# Altium PCB 7-SEGMENT_DISPLAY_4_DIGITS.PcbDoc
Units mm, origin at the board's own origin, x right, y up, seen from the top; angles counter-clockwise.
Board outline 185.55 x 84.02 mm, 2 copper layers (Top Layer, Bottom Layer); 61 components, 80 nets, 219 pads, 18 vias.
Unrouted connection lines stored in the file: 4.
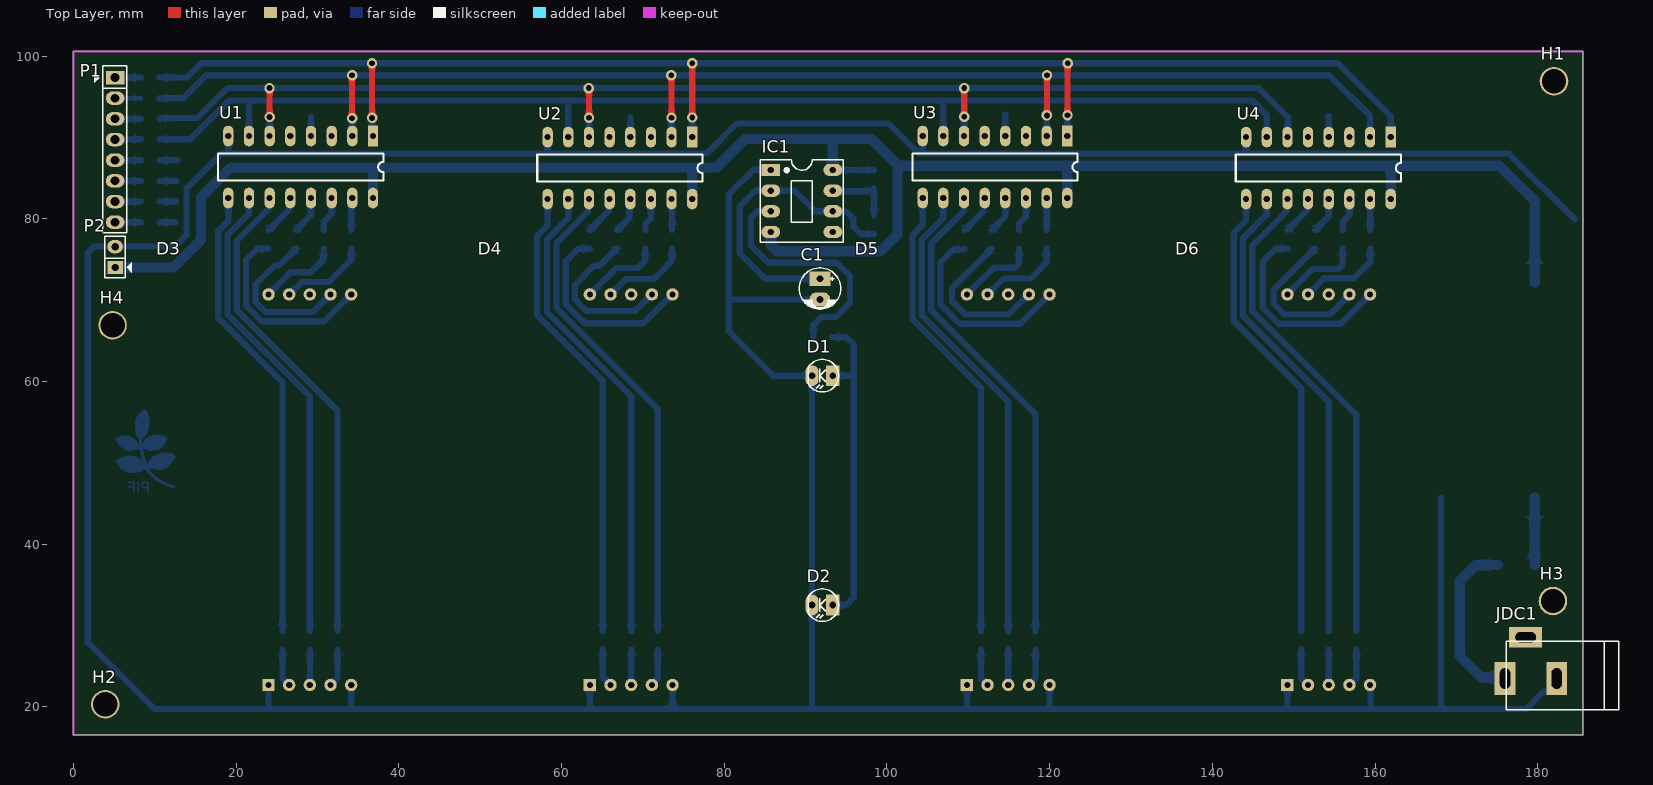
[diagram p0: Top Layer view]
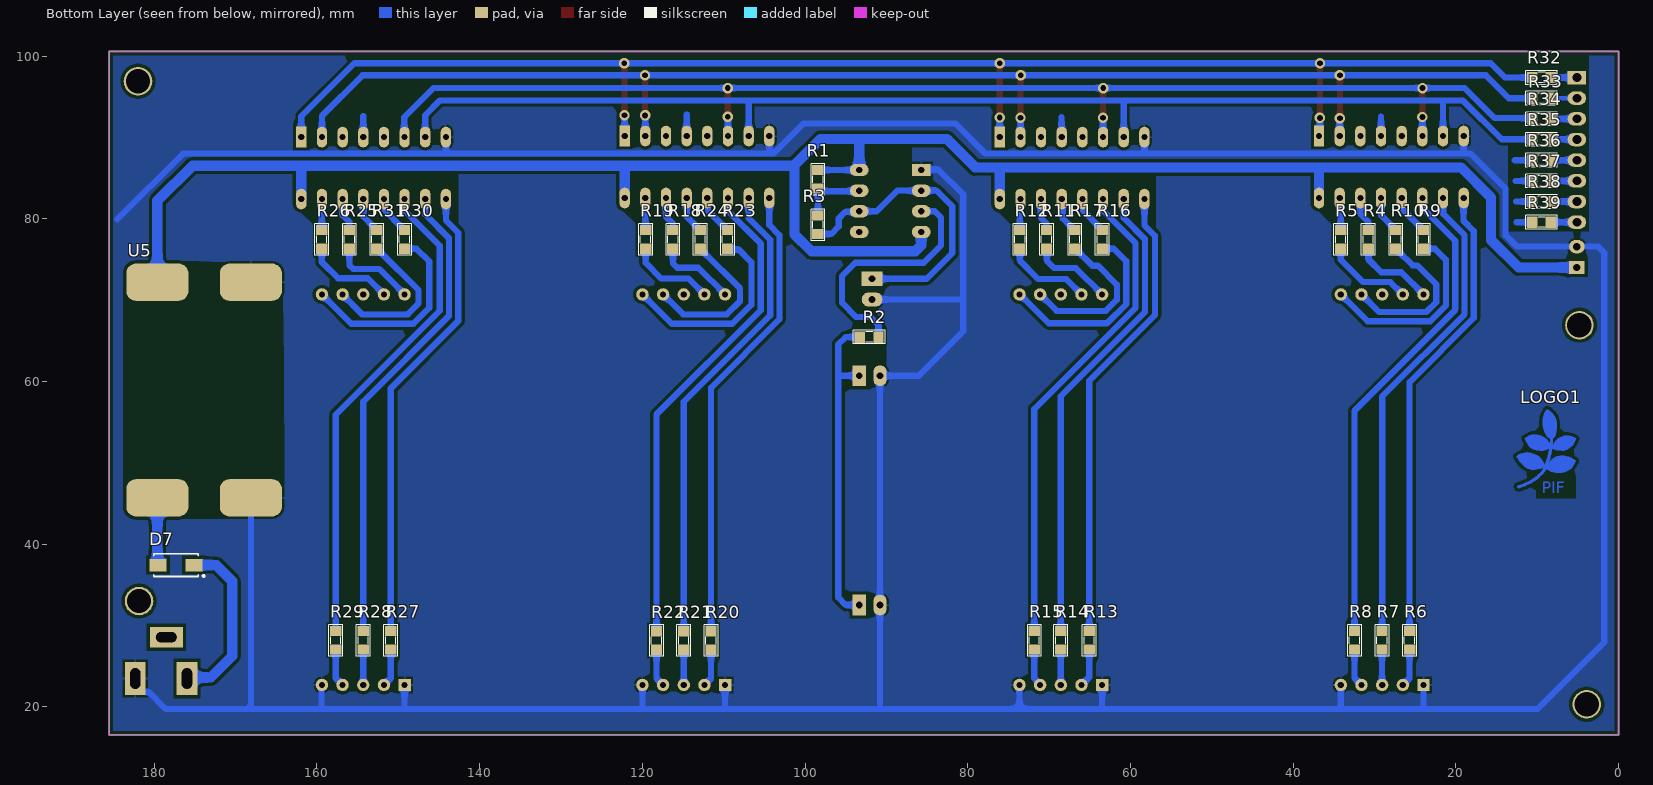
[diagram p1: Bottom Layer view, seen from below]
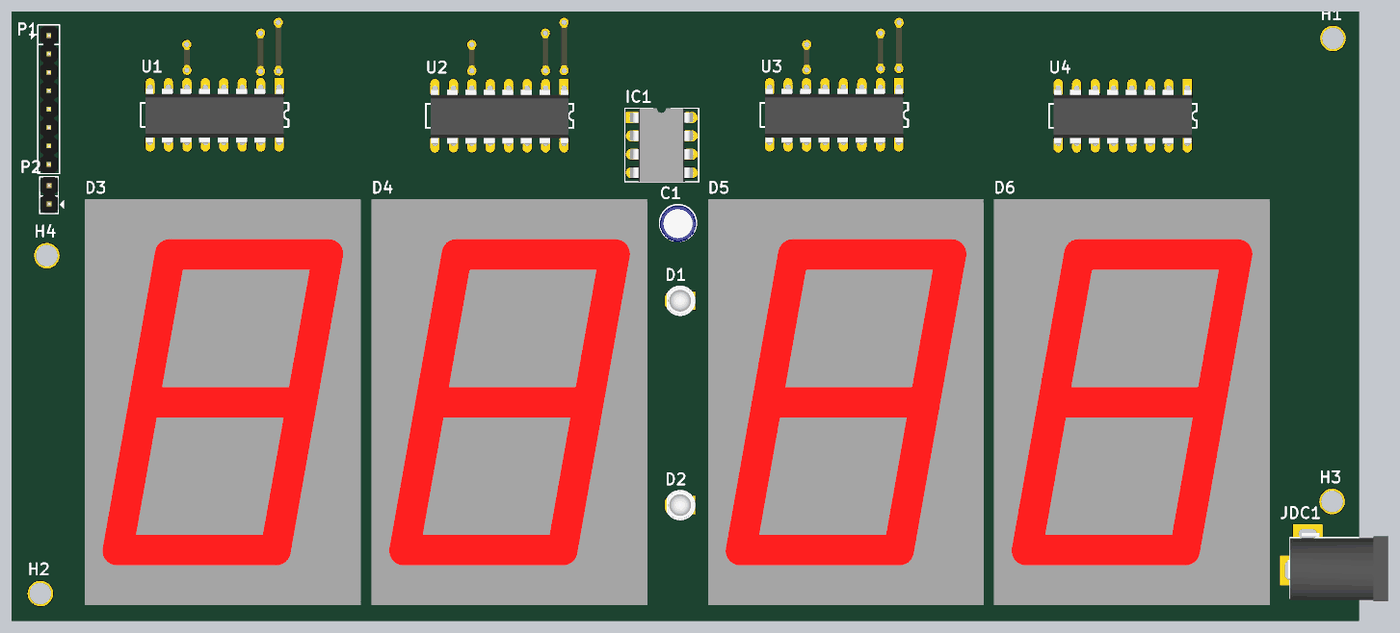
[diagram p2: 3D render of the assembled board from above, using the file's embedded part models]
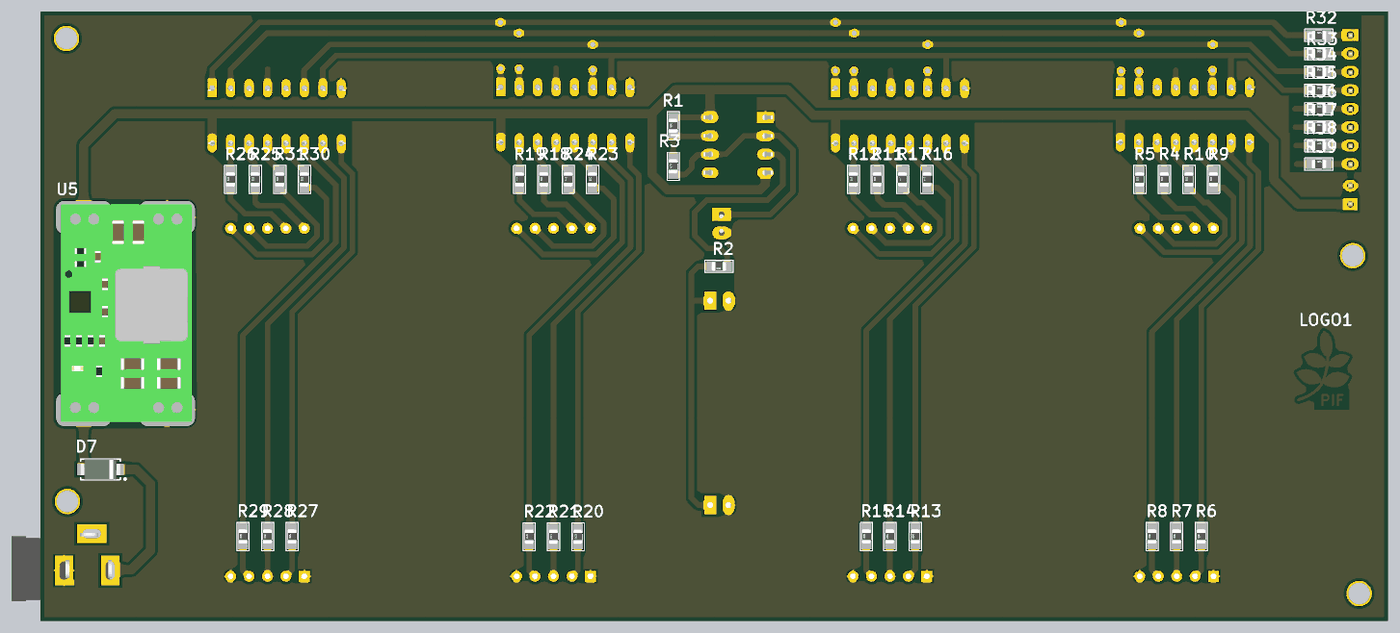
[diagram p3: 3D render of the assembled board from below, using the file's embedded part models]

## Layer stack, top to bottom
Top Solder: solder mask 0.0102, Solder Resist, Dk 3.5
Top Layer: signal copper 0.0356
Dielectric 1: dielectric 0.32, FR-4, Dk 4.8
Bottom Layer: signal copper 0.0356
Bottom Solder: solder mask 0.0102, Solder Resist, Dk 3.5

## Board outline
0,16.561 0,100.584 185.547,100.584 185.547,16.561

## Design rules (kind name [scope] priority, off if disabled: settings)
Clearance [All] p1: gap=0.381 ignorepadtopadclearanceinfootprint=TRUE
PolygonConnect [All] p1: connectstyle=Relief reliefconductorwidth=0.254 reliefentries=4 polygonreliefangle="90 Angle" airgapwidth=0.254
RoutingVias [All] p1: holewidth=0.711 width=1.27 viastyle="Through Hole" minholewidth=0.711 minwidth=1.27 maxholewidth=0.762 maxwidth=1.524
SolderMaskExpansion [All] p1: expansion=0.102 istentingtop=FALSE
Width [All] p1: maxlimit=1.27 minlimit=0.254 preferedwidth=0.762
30 further rules are at their usual default settings.

## Components (designator, comment, footprint, x,y, rotation, side; value= is the part's Value field where it differs from the comment)
C1 "Cap Pol" CP1/2 91.77,72.619 r270 top value=4.7uF
D1 "LED" LED-3mm 93.332,60.719 r180 top
D2 "LED" LED-3mm 93.332,32.525 r180 top
D3 "7-SEGMENT DISPLAY" 7-SEGMENT 29.071,46.701 r0 top
D4 "7-SEGMENT DISPLAY" 7-SEGMENT 68.568,46.701 r0 top
D5 "7-SEGMENT DISPLAY" 7-SEGMENT 114.912,46.701 r0 top
D6 "7-SEGMENT DISPLAY" 7-SEGMENT 154.305,46.701 r0 top
D7 "D Schottky" SS34 177.317,37.44 r0 bottom
H1 "Hole" "LO KHOAN 3MM" 181.991,96.901 r0 top
H2 "Hole" "LO KHOAN 3MM" 3.937,20.32 r0 top
H3 "Hole" "LO KHOAN 3MM" 181.864,33.02 r0 top
H4 "Hole" "LO KHOAN 3MM" 4.826,66.929 r0 top
IC1 "LM555" DIP8/W0.3 85.725,86 r270 top
JDC1 "Jack DC" DC-IN 179.146,26.035 r180 top value="Jac DC"
LOGO1 "LOGO PIF" "PIF LOGO BIG TOP" 12.573,46.711 r180 bottom
P1 "Header 8" JP8 5.131,97.358 r270 top
P2 "Header 2" JP2 5.131,74.015 r90 top
R1 "RESISTOR SMD" RES-SM-0805 98.425,83.714 r90 bottom value=1K
R2 "RESISTOR SMD" RES-SM-0805 90.983,65.456 r0 bottom value=1K
R3 "RESISTOR SMD" RES-SM-0805 98.425,78.126 r90 bottom value=470K
R4 "RESISTOR SMD" RES-SM-0805 30.777,76.327 r90 bottom value=100
R5 "RESISTOR SMD" RES-SM-0805 34.164,76.327 r90 bottom value=100
R6 "RESISTOR SMD" RES-SM-0805 25.698,27.051 r90 bottom value=100
R7 "RESISTOR SMD" RES-SM-0805 29.084,27.051 r90 bottom value=100
R8 "RESISTOR SMD" RES-SM-0805 32.471,27.051 r90 bottom value=100
R9 "RESISTOR SMD" RES-SM-0805 24.004,76.327 r90 bottom value=100
R10 "RESISTOR SMD" RES-SM-0805 27.391,76.327 r90 bottom value=100
R11 "RESISTOR SMD" RES-SM-0805 70.326,76.327 r90 bottom value=100
R12 "RESISTOR SMD" RES-SM-0805 73.602,76.327 r90 bottom value=100
R13 "RESISTOR SMD" RES-SM-0805 65.068,27.051 r90 bottom value=100
R14 "RESISTOR SMD" RES-SM-0805 68.58,27.051 r90 bottom value=100
R15 "RESISTOR SMD" RES-SM-0805 71.824,27.051 r90 bottom value=100
R16 "RESISTOR SMD" RES-SM-0805 63.468,76.327 r90 bottom value=100
R17 "RESISTOR SMD" RES-SM-0805 66.846,76.327 r90 bottom value=100
R18 "RESISTOR SMD" RES-SM-0805 116.243,76.327 r90 bottom value=100
R19 "RESISTOR SMD" RES-SM-0805 119.596,76.327 r90 bottom value=100
R20 "RESISTOR SMD" RES-SM-0805 111.557,27.026 r90 bottom value=100
R21 "RESISTOR SMD" RES-SM-0805 114.91,27.026 r90 bottom value=100
R22 "RESISTOR SMD" RES-SM-0805 118.262,27.026 r90 bottom value=100
R23 "RESISTOR SMD" RES-SM-0805 109.537,76.327 r90 bottom value=100
R24 "RESISTOR SMD" RES-SM-0805 112.89,76.327 r90 bottom value=100
R25 "RESISTOR SMD" RES-SM-0805 156.011,76.327 r90 bottom value=100
R26 "RESISTOR SMD" RES-SM-0805 159.398,76.327 r90 bottom value=100
R27 "RESISTOR SMD" RES-SM-0805 150.918,27.051 r90 bottom value=100
R28 "RESISTOR SMD" RES-SM-0805 154.305,27.051 r90 bottom value=100
R29 "RESISTOR SMD" RES-SM-0805 157.692,27.051 r90 bottom value=100
R30 "RESISTOR SMD" RES-SM-0805 149.238,76.327 r90 bottom value=100
R31 "RESISTOR SMD" RES-SM-0805 152.624,76.327 r90 bottom value=100
R32 "RESISTOR SMD" RES-SM-0805 10.617,97.358 r180 bottom value=10K
R33 "RESISTOR SMD" RES-SM-0805 10.617,94.818 r180 bottom value=10K
R34 "RESISTOR SMD" RES-SM-0805 10.617,92.278 r180 bottom value=10K
R35 "RESISTOR SMD" RES-SM-0805 10.617,89.764 r180 bottom value=10K
R36 "RESISTOR SMD" RES-SM-0805 10.617,87.198 r180 bottom value=10K
R37 "RESISTOR SMD" RES-SM-0805 10.617,84.658 r180 bottom value=10K
R38 "RESISTOR SMD" RES-SM-0805 10.617,82.118 r180 bottom value=10K
R39 "RESISTOR SMD" RES-SM-0805 10.617,79.578 r180 bottom value=10K
U1 "74LS48" 74LS48 36.83,90.17 r270 top
U2 "74LS48" 74LS48 76.073,90.043 r270 top
U3 "74LS48" 74LS48 122.174,90.17 r270 top
U4 "74LS48" 74LS48 161.925,90.043 r270 top
U5 "BUCK MINI560" "BUCK MINI560" 173.863,58.953 r180 bottom

## Footprints (in the part's own frame and the unit in brackets; to place one, negate y for a bottom-side part, rotate by r counter-clockwise, add the part's x,y. Pads: shape width x height; smd on the part's side, far side on the other; paste and mask are expansions set on the pad)
7-SEGMENT [mil]
  rect 60x60 hole 30: 1(-200,-944.88)
  round 60 hole 30: 2(-100,-944.88) 3(0,-944.88) 4(100,-944.88) 5(200,-944.88) 6(200,944.88) 7(100,944.88) 8(0,944.88) 9(-100,944.88) 10(-200,944.88)
  body extent -748,-1102 748,1102, height 476
74LS48 [mil]
  rect 100x50 hole 30: 1(0,0)
  oval 100x50 hole 30: 2(0,-100) 3(0,-200) 4(0,-300) 5(0,-400) 6(0,-500) 7(0,-600) 8(0,-700) 9(300,-700) 10(300,-600) 11(300,-500) 12(300,-400) 13(300,-300) 14(300,-200) 15(300,-100) 16(300,0)
  silkscreen extent 85,-750 215,50, body extent 6,-724 302,24, height 120
"BUCK MINI560" [mm]
  rrect50% 7.62x4.572 smd: 1(-5.75,-13.25) 2(5.75,-13.25) 3(5.75,13.25) 4(-5.75,13.25)
  body extent -8.9,-14.98 9.1,15.02, height 5.62
CP1/2 [mil] "Tu hoa < 22uF/16>50V"
  rect 70x100 hole 32: 1(0,0)
  oval 70x100 hole 32: 2(100,0)
  silkscreen extent -53,-100 146,100, body extent -49,-99 149,99, height 287
DC-IN [mil] "Jac DC input"
  rect 100x160 hole 50 slot 100 at 90 deg: 1(125,100) 2(-125,100)
  rect 160x100 hole 50 slot 100 at 0 deg: 3(25,-100)
  silkscreen extent -425,-80 120,250, body extent -410,-105 134,269, height 434
DIP8/W0.3 [mil] "8 PIN, W 300mil, Pin to pin 100mil"
  rect 60x90 hole 31: 1(0,0)
  oval 60x90 hole 31: 2(100,0) 3(200,0) 4(300,0) 5(300,300) 6(200,300) 7(100,300) 8(0,300)
  silkscreen extent -50,-50 350,350, body extent -50,-40 350,336, height 201
JP2 [mil]
  rect 65x75 hole 36: 1(0,0)
  oval 65x75 hole 36: 2(101,0)
  silkscreen extent -50,-81 150,50, body extent -48,-50 148,48, height 323
JP8 [mil] "JP8"
  rect 65x90 hole 42: 1(0,0)
  oval 65x90 hole 42: 2(100,0) 3(200,0) 4(300,0) 5(400,0) 6(500,0) 7(600,0) 8(700,0)
  silkscreen extent -56,-100 752,57, body extent -48,-50 748,48, height 323
LED-3mm [mil] "LED 2 PIN, 3ly Only colour"
  rect 65x100 hole 32: 1(0,0)
  oval 65x100 hole 32: 2(100,0)
  silkscreen extent -29,-78 118,79, body extent -25,-75 113,75, height 217
"LO KHOAN 3MM" [mil]
  round 138 hole 118.1: 1(0,0)
"PIF LOGO BIG TOP" [mm]
  Top Layer region: 2.616,6.766 2.618,6.765 2.62,6.765 2.852,6.702 2.853,6.702 2.853,6.702 3.022,6.648 3.024,6.647 3.025,6.647 3.205,6.552 3.207,6.55 3.364,6.468 3.364,6.467 3.365,6.467 3.672,6.265 3.674,6.263 3.676,6.262 3.973,5.881 3.973,5.88 3.974,5.879 4.174,5.552 4.174,5.552 4.174,5.551 4.238,5.446 4.239,5.44 4.24,5.435 4.188,5.085 4.187,5.084 4.187,5.082 4.184,5.079 4.183,5.076 4.182,5.076 4.181,5.075 4.18,5.074 4.178,5.073 3.755,4.872 3.753,4.872 3.752,4.871 3.275,4.765 3.273,4.766 3.272,4.765 2.902,4.754 2.901,4.754 2.899,4.754 2.455,4.818 2.454,4.818 2.452,4.818 2.166,4.903 2.166,4.903 2.165,4.903 1.985,4.978 1.984,4.979 1.982,4.98 1.855,5.075 1.855,5.075 1.854,5.075 1.653,5.234 1.652,5.235 1.651,5.236 1.493,5.405 1.492,5.407 1.49,5.408 1.225,5.863 1.225,5.863 1.225,5.864 1.098,6.129 1.098,6.129 1.097,6.13 1.024,6.309 1.024,6.314 1.023,6.319 1.024,6.32 1.024,6.322 1.027,6.325 1.03,6.329 1.305,6.509 1.306,6.509 1.307,6.51 1.613,6.668 1.614,6.669 1.615,6.669 1.806,6.733 1.806,6.733 1.807,6.733 1.955,6.775 1.956,6.775 1.957,6.776 2.148,6.797 2.149,6.797 2.151,6.797
  Top Layer region: 3.754,9.891 3.76,9.891 3.94,9.806 3.94,9.806 3.942,9.805 4.09,9.71 4.091,9.709 4.092,9.708 4.293,9.529 4.293,9.528 4.294,9.528 4.452,9.38 4.452,9.379 4.454,9.378 4.613,9.166 4.613,9.166 4.613,9.166 4.698,9.049 4.698,9.048 4.7,9.046 4.773,8.877 4.773,8.877 4.773,8.877 4.827,8.75 4.827,8.748 4.827,8.747 4.891,8.462 4.891,8.462 4.891,8.462 4.933,8.26 4.933,8.259 4.934,8.259 4.965,8.037 4.965,8.036 4.965,8.035 4.965,7.802 4.965,7.802 4.965,7.801 4.944,7.472 4.944,7.472 4.944,7.472 4.923,7.197 4.922,7.196 4.922,7.196 4.901,7.069 4.901,7.069 4.901,7.068 4.859,6.846 4.858,6.846 4.859,6.845 4.832,6.758 4.832,6.757 4.832,6.756 4.76,6.593 4.759,6.592 4.759,6.591 4.667,6.458 4.667,6.458 4.666,6.457 4.524,6.294 4.523,6.294 4.522,6.292 4.488,6.267 4.489,6.183 4.488,6.18 4.489,6.178 4.486,6.175 4.485,6.171 4.482,6.17 4.481,6.168 4.477,6.168 4.473,6.166 4.471,6.167 4.469,6.167 4.204,6.241 4.202,6.243 4.199,6.243 4.062,6.328 4.062,6.328 4.061,6.329 3.817,6.519 3.816,6.521 3.814,6.522 3.602,6.797 3.602,6.798 3.601,6.799 3.506,6.969 3.506,6.97 3.505,6.971 3.41,7.225 3.336,7.415 3.336,7.416 3.335,7.417 3.282,7.629 3.282,7.629 3.282,7.629 3.229,7.84 3.23,7.842 3.229,7.843 3.218,8.034 3.218,8.034 3.218,8.035 3.218,8.437 3.218,8.438 3.218,8.438 3.239,8.681 3.239,8.682 3.239,8.682 3.271,8.968 3.272,8.97 3.272,8.972 3.346,9.172 3.346,9.173 3.346,9.173 3.421,9.363 3.422,9.364 3.422,9.366 3.57,9.61 3.57,9.61 3.571,9.61 3.686,9.779 3.739,9.884 3.743,9.888 3.748,9.892 3.748,9.892 3.748,9.892
  Top Layer region: 1.304,4.566 1.305,4.566 1.739,4.534 1.74,4.533 1.742,4.533 2.08,4.439 2.081,4.438 2.082,4.438 2.538,4.247 2.539,4.247 2.54,4.247 2.761,4.12 2.763,4.118 2.764,4.117 2.891,4.001 2.892,3.999 2.894,3.998 2.999,3.85 2.999,3.85 3,3.85 3.127,3.659 3.127,3.659 3.127,3.659 3.339,3.331 3.339,3.33 3.339,3.33 3.403,3.203 3.477,3.054 3.478,3.051 3.479,3.047 3.479,3.005 3.478,3.002 3.478,2.999 3.354,2.686 3.353,2.685 3.352,2.683 3.351,2.682 3.35,2.68 3.347,2.679 3.345,2.677 3.343,2.677 3.342,2.676 3.15,2.629 3.012,2.587 3.011,2.587 3.011,2.587 2.81,2.544 2.81,2.544 2.81,2.544 2.535,2.491 2.534,2.491 2.534,2.491 2.29,2.449 2.289,2.449 2.288,2.448 2.055,2.448 2.054,2.449 2.053,2.448 1.821,2.47 1.819,2.47 1.818,2.47 1.639,2.512 1.638,2.513 1.638,2.513 1.384,2.587 1.383,2.588 1.381,2.588 1.094,2.747 1.094,2.747 1.094,2.747 0.945,2.843 0.944,2.845 0.943,2.845 0.646,3.152 0.646,3.152 0.646,3.152 0.467,3.342 0.466,3.343 0.466,3.343 0.349,3.481 0.349,3.483 0.347,3.484 0.263,3.642 0.093,3.938 0.093,3.939 0.093,3.939 0.009,4.098 0.008,4.103 0.007,4.109 0.007,4.109 0.007,4.11 0.011,4.114 0.014,4.119 0.31,4.32 0.312,4.32 0.313,4.321 0.503,4.406 0.504,4.406 0.505,4.406 0.749,4.481 0.749,4.481 0.749,4.481 0.971,4.544 0.973,4.544 0.974,4.545 1.303,4.566
  Top Layer region: 6.291,6.662 6.293,6.662 6.547,6.62 6.547,6.62 6.548,6.62 6.78,6.567 6.782,6.566 6.783,6.566 6.953,6.492 6.953,6.492 6.953,6.492 7.122,6.417 7.123,6.416 7.125,6.416 7.336,6.268 7.339,6.263 7.342,6.259 7.342,6.258 7.343,6.257 7.342,6.252 7.342,6.247 7.3,6.163 7.236,6.005 7.236,6.005 7.236,6.004 7.141,5.814 7.141,5.814 7.141,5.814 7.024,5.581 7.023,5.58 7.022,5.578 6.895,5.419 6.895,5.419 6.895,5.418 6.768,5.27 6.766,5.269 6.765,5.268 6.565,5.119 6.564,5.119 6.564,5.119 6.267,4.928 6.266,4.928 6.264,4.927 6.01,4.832 6.01,4.832 6.009,4.832 5.871,4.789 5.869,4.789 5.868,4.789 5.604,4.767 5.602,4.768 5.601,4.767 5.103,4.82 5.103,4.82 5.102,4.82 4.88,4.852 4.88,4.853 4.879,4.853 4.719,4.895 4.719,4.895 4.718,4.895 4.591,4.938 4.59,4.939 4.588,4.939 4.409,5.045 4.408,5.047 4.406,5.047 4.405,5.049 4.404,5.049 4.403,5.052 4.401,5.055 4.402,5.057 4.401,5.059 4.401,5.06 4.401,5.061 4.453,5.389 4.455,5.391 4.455,5.394 4.635,5.744 4.636,5.744 4.636,5.745 4.763,5.936 4.765,5.937 4.765,5.938 4.943,6.116 4.944,6.116 4.944,6.117 5.169,6.299 5.17,6.299 5.17,6.3 5.195,6.317 5.195,6.317 5.196,6.317 5.247,6.349 5.248,6.349 5.248,6.349 5.301,6.378 5.301,6.378 5.302,6.379 5.356,6.405 5.356,6.405 5.357,6.405 5.384,6.417 5.563,6.502 5.564,6.502 5.564,6.502 5.797,6.598 5.798,6.598 5.8,6.599 6.001,6.641 6.002,6.641 6.003,6.641 6.289,6.663
  Top Layer region: 5.724,4.186 5.725,4.187 5.927,4.166 5.928,4.165 5.929,4.165 6.12,4.113 6.5,4.017 6.501,4.016 6.503,4.016 6.63,3.964 6.63,3.963 6.631,3.963 6.916,3.815 6.917,3.814 6.918,3.814 7.172,3.645 7.172,3.644 7.173,3.644 7.279,3.559 7.281,3.556 7.284,3.553 7.284,3.551 7.285,3.548 7.284,3.545 7.284,3.541 7.21,3.35 7.209,3.35 7.209,3.349 7.093,3.126 7.092,3.126 7.092,3.126 7.008,2.968 7.007,2.967 7.007,2.966 6.785,2.648 6.784,2.648 6.783,2.646 6.635,2.498 6.634,2.497 6.633,2.496 6.463,2.379 6.462,2.379 6.461,2.378 6.292,2.293 6.292,2.293 6.292,2.293 6.048,2.177 6.048,2.177 6.047,2.177 5.899,2.114 5.897,2.114 5.895,2.112 5.641,2.07 5.64,2.07 5.639,2.07 5.258,2.059 5.258,2.059 5.257,2.059 4.855,2.08 4.854,2.081 4.852,2.08 4.546,2.144 4.545,2.144 4.545,2.144 4.291,2.219 4.29,2.22 4.288,2.22 4.034,2.336 4.034,2.336 4.033,2.336 3.842,2.453 3.842,2.454 3.841,2.454 3.703,2.56 3.702,2.561 3.701,2.562 3.7,2.564 3.698,2.566 3.698,2.568 3.697,2.571 3.697,2.572 3.696,2.573 3.697,2.575 3.697,2.578 3.899,3.213 3.902,3.217 3.905,3.222 3.967,3.263 4.198,3.536 4.304,3.663 4.305,3.664 4.306,3.665 4.464,3.802 4.465,3.802 4.466,3.803 4.731,3.973 4.732,3.973 4.733,3.974 4.954,4.08 4.957,4.08 4.958,4.081 5.339,4.155 5.34,4.155 5.341,4.156 5.722,4.187
  Top Layer lines w0.4: 4.343,6.727 4.312,5.861 4.301,5.628 4.28,5.364 4.259,5.099 4.201,4.845 4.106,4.41 4.011,3.987 3.979,3.85 3.662,2.95 3.481,2.516 3.281,2.22 3.1,1.987 2.709,1.616 2.413,1.373 1.588,0.865 1.021,0.607 0.284,0.345
RES-SM-0805 [mil]
  rect 50x55 smd: 1(0,0) 2(90,0)
  silkscreen extent -32,-34 121,33, body extent 6,-25 84,25, height 31
SS34 [mm] "DO-214-AC/SMA Molded Diode, Body 5.3x2.6mm, IPC Medium Density"
  rect 2.1x1.55 smd: A(-2.2,0) K(2.2,0)
  silkscreen extent -3.52,-1.4 2.75,1.45, body extent -2.75,-1.4 2.75,1.4, height 2.3

## Part data
C1: "Polarized Capacitor (Radial)"
D3 D4 D5 D6: library part 7-SEGMENT
D7: "Schottky Diode", Supplier Part Number 1=SS14, Code_JEDEC=DO-214-AA, LatestRevisionDate=17-Jul-2002, LatestRevisionNote="Re-released for DXP Platform.", PackageDescription="DO-214-AA/SMB; 2 C-Bend Leads; Body 5.3 x 3.6 mm, inc. leads (LxW)", PackageReference=SMB, Published=8-Jun-2000, Publisher="Altium Limited", Supplier 1="Arrow Electronics", Supplier 2=RSComponents, Supplier Part Number 2=8080433
H1 H2 H3 H4: "Hole 3mm"
IC1: "Timer"
JDC1: "Jack DC input"
P1: "Header, 8-Pin", LatestRevisionDate=17-Jul-2002, LatestRevisionNote="Re-released for DXP Platform.", Publisher="Altium Limited"
P2: "Header, 2-Pin", LatestRevisionDate=17-Jul-2002, LatestRevisionNote="Re-released for DXP Platform.", Publisher="Altium Limited"
R1 R2 R3 R4 R5 R6 R7 R8 R9 R10 R11 R12 R13 R14 R15 R16 R17 R18 R19 R20 R21 R22 R23 R24 R25 R26 R27 R28 R29 R30 R31 R32 R33 R34 R35 R36 R37 R38 R39: "Resistor"
U1 U2 U3 U4: "74LS48 - ACTIVE HIGH"
U5: "MODULE BUCK MINI560"

## Via types
v1: diameter 1.27, hole 0.711, Top Layer to Bottom Layer, 18 vias

## Nets (pads, with @x,y where several pads share a name; then routed paths per layer and width w, separated by ;. In a path a pad name is that pad's centre, name@x,y a point inside that pad or via, vN(x,y) a via of type N, cw(c..) or ccw(c..) an arc to the next point about the centre after c; other vN are vias at no path point)
+5: IC1.4 IC1.8 P2.1 R1.2 U1.16 U2.16 U3.16 U4.16 U5.4 | length 248.8
  Bottom Layer w0.762: IC1.8 R1.2
  Bottom Layer w1.27: P2.1 12.293,74.015 15.697,77.419 15.697,82.626 19.38,86.309 36.837,86.309 ; U1.16 36.83,86.303 36.837,86.309 ; U2.16 76.073,86.223 75.986,86.309 ; IC1.4 85.725,76.741 86.469,75.997 99.212,75.997 101.308,78.092 101.308,86.601 98.095,89.814 93.363,89.814 ; IC1.8 93.345,89.796 93.363,89.814 ; 101.371,86.538 122.193,86.538 ; U3.16 122.174,86.519 122.193,86.538 ; U4.16 161.925,86.515 161.902,86.538 ; U5.4 179.613,82.204 175.279,86.538 161.902,86.538 ; 36.837,86.309 75.986,86.309 ; 75.986,86.309 79.096,86.309 82.601,89.814 93.363,89.814 ; 122.193,86.538 161.902,86.538
BIT_A: R35.1 U1.7 U2.7 U3.7 U4.7 | length 154.8
  Bottom Layer w0.762: R35.1 14.376,89.764 19.152,94.539 21.627,94.539 ; U1.7 21.59,94.502 21.627,94.539 ; U2.7 60.833,94.534 60.838,94.539 ; U3.7 106.934,94.475 106.998,94.539 ; U4.7 146.685,92.735 144.882,94.539 106.998,94.539 ; 21.627,94.539 60.838,94.539 ; 60.838,94.539 106.998,94.539
BIT_B: R32.1 U1.1 U2.1 U3.1 U4.1 | length 184.3
  Top Layer w0.762: v1(36.712,99.111) 36.728,99.095 v1(36.728,92.405) ; v1(76.068,99.111) 76.073,99.106 v1(76.073,92.456) ; v1(122.199,92.735) 122.199,99.085 v1(122.225,99.111)
  Bottom Layer w0.762: R32.1 13.962,97.358 15.714,99.111 v1(36.712,99.111) v1(76.068,99.111) v1(122.225,99.111) 155.397,99.111 161.925,92.583 U4.1 ; v1(36.728,92.405) 36.728,90.272 U1.1 ; U2.1 v1(76.073,92.456) ; U3.1 122.174,92.71 v1(122.199,92.735)
BIT_C: R33.1 U1.2 U2.2 U3.2 U4.2 | length 177.2
  Top Layer w0.762: v1(34.265,92.354) v1(34.265,97.638) ; v1(73.504,97.638) 73.504,97.618 73.533,97.589 v1(73.533,92.431) ; v1(119.659,92.71) 119.659,97.629 v1(119.668,97.638)
  Bottom Layer w0.762: R33.1 13.5,94.818 16.32,97.638 v1(34.265,97.638) v1(73.504,97.638) v1(119.668,97.638) 154.381,97.638 159.385,92.634 U4.2 ; v1(34.265,92.354) 34.29,92.329 U1.2 ; U2.2 v1(73.533,92.431) ; U3.2 119.634,92.685 v1(119.659,92.71)
BIT_D: R34.1 U1.6 U2.6 U3.6 U4.6 | length 161.9
  Top Layer w0.762: v1(24.105,96.063) 24.13,96.037 v1(24.13,92.507) ; v1(63.365,96.063) 63.373,96.055 v1(63.373,92.431) ; v1(109.499,92.532) v1(109.5,96.063)
  Bottom Layer w0.762: R34.1 10.714,92.375 15.247,92.375 18.935,96.063 v1(24.105,96.063) v1(63.365,96.063) v1(109.5,96.063) 145.679,96.063 149.266,92.476 U4.6@149.266,90.084 ; U1.6 v1(24.13,92.507) ; U2.6 v1(63.373,92.431) ; U3.6 109.474,92.507 v1(109.499,92.532)
DIGIT_1: R36.1 U1.4 | length 4.5
  Bottom Layer w0.762: R36.1 12.776,87.198 ; U1.4 29.21,92.532
DIGIT_2: R37.1 U2.4 | length 4.6
  Bottom Layer w0.762: R37.1 12.7,84.658 ; U2.4 68.478,90.068 68.478,92.507
DIGIT_3: R38.1 U3.4 | length 4.6
  Bottom Layer w0.762: R38.1 12.624,82.118 ; U3.4 114.554,92.812
DIGIT_4: R39.1 U4.4 | length 4.5
  Bottom Layer w0.762: R39.1 12.548,79.578 ; 154.28,92.634 154.305,92.608 U4.4
GND: C1.2 D1.2 D2.2 D3.1 D3.5 D4.1 D4.5 D5.1 D5.5 D6.1 D6.5 IC1.1 JDC1.2 P2.2 U1.8 U2.8 U3.8 U4.8 U5.2 U5.3 | length 577.8
  Bottom Layer w0.762: U1.8 19.05,88.044 19.017,88.011 ; D3.1 23.991,19.736 ; D3.5 34.151,19.76 34.176,19.736 ; U2.8 58.293,88.032 58.272,88.011 ; D4.1 63.488,19.75 63.474,19.736 ; D4.5 73.663,22.687 73.663,19.736 ; IC1.1 85.67,86.055 83.617,86.055 80.569,83.007 80.569,69.875 ; C1.2 80.772,70.079 80.569,69.875 ; U3.8 104.394,88.011 ; D5.1 109.832,19.741 109.826,19.736 ; D5.5 119.992,19.74 119.995,19.736 ; U4.8 144.145,88.079 144.077,88.011 ; D6.1 149.225,19.751 149.24,19.736 ; D6.5@159.42,22.666 159.42,19.736 ; U5.2 168.113,20.182 168.559,19.736 ; JDC1.2 182.321,22.733 181.432,21.844 180.67,21.844 178.562,19.736 168.559,19.736 ; 184.531,79.934 176.454,88.011 144.077,88.011 ; 19.017,88.011 58.272,88.011 ; 19.017,88.011 18.195,88.011 13.894,83.71 13.894,77.978 12.497,76.581 2.54,76.581 1.778,75.819 1.778,27.94 9.982,19.736 23.991,19.736 ; 23.991,19.736 34.176,19.736 ; 34.176,19.736 63.474,19.736 ; 58.272,88.011 77.826,88.011 81.534,91.719 100.178,91.719 103.886,88.011 104.394,88.011 ; 63.474,19.736 73.663,19.736 ; 73.663,19.736 90.86,19.736 ; 80.569,69.875 80.569,66.167 86.017,60.719 D1.2 D2.2 90.792,19.803 90.86,19.736 ; 90.86,19.736 109.826,19.736 ; 104.394,88.011 144.077,88.011 ; 109.826,19.736 119.995,19.736 ; 119.995,19.736 149.24,19.736 ; 149.24,19.736 159.42,19.736 ; 159.42,19.736 168.559,19.736
NetC1_1: C1.1 IC1.2 IC1.6 R3.1 | length 37.3
  Bottom Layer w0.762: C1.1@92.025,72.619 85.065,72.619 81.915,75.768 81.915,81.534 83.871,83.49 85.695,83.49 IC1.2 88.65,83.46 91.19,80.92 IC1.6 93.417,80.848 95.047,80.848 95.86,80.035 95.86,79.07 96.804,78.126 R3.1
NetD1_1: D1.1 D2.1 R2.2 | length 39.7
  Bottom Layer w0.762: R2.2 95.021,65.456 95.912,64.565 95.912,60.693 ; D2.1 94.981,32.525 95.912,33.456 95.912,60.693 ; D1.1 95.886,60.719 95.912,60.693
NetD3_2: D3.2 R6.1 | length 4.7
  Bottom Layer w0.762: R6.1 25.698,23.535 D3.2
NetD3_3: D3.3 R7.1 | length 4.4
  Bottom Layer w0.762: D3.3 29.084,22.714 R7.1
NetD3_4: D3.4 R8.1 | length 4.7
  Bottom Layer w0.762: D3.4 32.471,23.561 R8.1
NetD3_6: D3.6 R9.1 | length 24
  Bottom Layer w0.762: R9.1 24.001,76.33 22.609,76.33 21.234,74.955 21.234,69.326 23.149,67.412 30.862,67.412 D3.6
NetD3_7: D3.7 R10.1 | length 19.6
  Bottom Layer w0.762: R10.1 27.327,76.327 27.073,76.073 27.073,76.01 25.333,74.27 24.765,74.27 22.428,71.933 22.428,69.748 23.622,68.555 29.465,68.555 D3.7
NetD3_9: D3.9 R5.1 | length 10.8
  Bottom Layer w0.762: D3.9 28.055,72.225 31.407,72.225 34.164,74.982 R5.1
NetD3_10: D3.10 R4.1 | length 9.9
  Bottom Layer w0.762: D3.10 26.722,73.431 29.185,73.431 30.749,74.995 30.749,76.298 R4.1
NetD4_2: D4.2 R13.1 | length 4.7
  Bottom Layer w0.762: R13.1 65.068,23.662 D4.2
NetD4_3: D4.3 R14.1 | length 4.4
  Bottom Layer w0.762: D4.3 68.58,22.713 R14.1
NetD4_4: D4.4 R15.1 | length 4.6
  Bottom Layer w0.762: D4.4 71.108,22.813 71.824,23.529 R15.1
NetD4_6: D4.6 R16.1 | length 24.4
  Bottom Layer w0.762: R16.1 62.052,76.327 60.528,74.803 60.528,69.52 62.89,67.158 70.053,67.158 73.597,70.701 D4.6
NetD4_7: D4.7 R17.1 | length 19.7
  Bottom Layer w0.762: R17.1 66.782,76.327 64.674,74.219 63.983,74.219 61.671,71.907 61.671,70.028 63.017,68.682 69.088,68.682 D4.7
NetD4_9: D4.9 R12.1 | length 10.8
  Bottom Layer w0.762: D4.9 66.028,70.727 67.894,72.593 71.323,72.593 73.602,74.872 R12.1
NetD4_10: D4.10 R11.1 | length 10
  Bottom Layer w0.762: D4.10 66.727,73.939 69.393,73.939 70.282,74.828 70.282,76.022 70.326,76.066 R11.1
NetD5_2: D5.2 R20.1 | length 4.7
  Bottom Layer w0.762: R20.1 111.557,23.529 112.372,22.714 D5.2
NetD5_3: D5.3 R21.1 | length 4.3
  Bottom Layer w0.762: R21.1 114.91,22.703 D5.3
NetD5_4: D5.4 R22.1 | length 4.7
  Bottom Layer w0.762: D5.4 117.452,22.718 118.262,23.529 R22.1
NetD5_6: D5.6 R23.1 | length 24.7
  Bottom Layer w0.762: R23.1 109.436,76.225 108.153,76.225 106.604,74.676 106.604,69.444 108.941,67.107 116.397,67.107 D5.6
NetD5_7: D5.7 R24.1 | length 19.7
  Bottom Layer w0.762: R24.1 112.827,76.327 112.573,76.073 112.573,76.01 108.001,71.438 108.001,69.85 109.601,68.25 115,68.25 D5.7
NetD5_9: D5.9 R19.1 | length 10.6
  Bottom Layer w0.762: D5.9 114.315,72.644 117.653,72.644 119.596,74.587 R19.1
NetD5_10: D5.10 R18.1 | length 9.8
  Bottom Layer w0.762: D5.10 113.121,73.99 115.722,73.99 116.243,74.511 R18.1
NetD6_2: D6.2 R27.1 | length 4.7
  Bottom Layer w0.762: R27.1 150.918,23.548 D6.2
NetD6_3: D6.3 R28.1 | length 4.3
  Bottom Layer w0.762: D6.3 R28.1
NetD6_4: D6.4 R29.1 | length 4.7
  Bottom Layer w0.762: D6.4 157.692,23.548 R29.1
NetD6_6: D6.6 R30.1 | length 24.9
  Bottom Layer w0.762: R30.1 147.777,76.327 146.202,74.752 146.202,69.037 148.133,67.107 155.791,67.107 D6.6
NetD6_7: D6.7 R31.1 | length 19.8
  Bottom Layer w0.762: R31.1 152.561,76.327 152.307,76.073 152.307,76.01 147.498,71.2 147.498,69.596 148.844,68.25 154.457,68.25 156.845,70.637 D6.7
NetD6_9: D6.9 R26.1 | length 10.9
  Bottom Layer w0.762: D6.9 153.759,72.695 157.404,72.695 159.398,74.689 R26.1
NetD6_10: D6.10 R25.1 | length 10.3
  Bottom Layer w0.762: D6.10 152.362,73.838 155.55,73.838 156.011,74.299 R25.1
NetD7_K: D7.K U5.1 | length 8.2
  Bottom Layer w1.27: D7.K@179.613,37.487 U5.1
NetIC1_3: IC1.3 R2.1 | length 30.3
  Bottom Layer w0.762: IC1.3 84.07,80.92 83.312,80.162 83.312,76.708 85.42,74.6 93.828,74.6 95.453,72.974 95.453,69.672 93.701,67.92 91.923,67.92 90.983,66.98 R2.1
NetIC1_7: IC1.7 R1.1 R3.2 | length 8.2
  Bottom Layer w0.762: IC1.7 93.417,83.388 98.036,83.388 98.361,83.714 R1.1 ; R3.2 R1.1@98.425,83.388
NetP1_1: P1.1 R32.2 | length 3.2
  Bottom Layer w0.762: P1.1 R32.2
NetP1_2: P1.2 R33.2 | length 3.2
  Bottom Layer w0.508: P1.2 R33.2
NetP1_3: P1.3 R34.2 | length 3.2
  Bottom Layer w0.762: P1.3 R34.2
NetP1_4: P1.4 R35.2 | length 3.2
  Bottom Layer w0.762: P1.4 5.156,89.764 R35.2
NetP1_5: P1.5 R36.2 | length 3.2
  Bottom Layer w0.762: P1.5 R36.2
NetP1_6: P1.6 R37.2 | length 3.2
  Bottom Layer w0.762: P1.6 R37.2
NetP1_7: P1.7 R38.2 | length 3.2
  Bottom Layer w0.762: P1.7 R38.2
NetP1_8: P1.8 R39.2 | length 3.2
  Bottom Layer w0.762: P1.8 R39.2
NetR4_2: R4.2 U1.14 | length 4.3
  Bottom Layer w0.762: R4.2 30.785,78.62 30.785,79.629 31.75,80.594 U1.14
NetR5_2: R5.2 U1.15 | length 4
  Bottom Layer w0.762: R5.2 34.164,81.652 34.29,81.778 U1.15
NetR6_2: R6.2 U1.9 | length 57
  Bottom Layer w0.762: U1.9 19.075,82.525 19.075,79.756 17.805,78.486 17.805,67.811 25.698,59.919 R6.2
NetR7_2: R7.2 U1.10 | length 58.5
  Bottom Layer w0.762: U1.10 21.59,80.62 18.948,77.978 18.948,68.284 29.072,58.161 29.072,29.35 R7.2
NetR8_2: R8.2 U1.11 | length 60
  Bottom Layer w0.762: U1.11 24.033,82.453 24.033,81.234 20.091,77.292 20.091,68.91 20.117,68.885 20.117,68.732 32.471,56.378 R8.2
NetR9_2: R9.2 U1.12 | length 5.1
  Bottom Layer w0.762: R9.2 24.068,78.613 24.322,78.867 24.322,78.93 26.573,81.182 26.573,82.453 U1.12
NetR10_2: R10.2 U1.13 | length 4.7
  Bottom Layer w0.762: R10.2 27.454,78.613 27.708,78.867 27.708,78.93 29.21,80.432 U1.13
NetR11_2: R11.2 U2.14 | length 4.1
  Bottom Layer w0.762: R11.2 70.313,78.626 70.313,79.4 70.993,80.08 U2.14
NetR12_2: R12.2 U2.15 | length 3.8
  Bottom Layer w0.762: U2.15 73.602,82.354 R12.2
NetR13_2: R13.2 U2.9 | length 57
  Bottom Layer w0.762: U2.9 58.293,79.223 56.998,77.927 56.998,68.157 65.068,60.087 R13.2
NetR14_2: R14.2 U2.10 | length 58.4
  Bottom Layer w0.762: U2.10 60.833,80.112 58.238,77.517 58.238,68.533 68.58,58.191 R14.2
NetR15_2: R15.2 U2.11 | length 59.9
  Bottom Layer w0.762: U2.11 63.276,82.326 63.276,81.332 63.246,81.302 63.246,80.874 59.381,77.009 59.381,69.05 71.824,56.608 R15.2
NetR16_2: R16.2 U2.12 | length 4.9
  Bottom Layer w0.762: R16.2 63.531,78.613 63.785,78.867 63.785,78.93 65.816,80.961 65.816,82.326 U2.12
NetR17_2: R17.2 U2.13 | length 4.5
  Bottom Layer w0.762: R17.2 66.909,78.613 68.356,80.059 68.356,82.326 U2.13
NetR18_2: R18.2 U3.14 | length 4.3
  Bottom Layer w0.762: R18.2 116.23,78.626 116.23,79.4 117.094,80.264 U3.14
NetR19_2: R19.2 U3.15 | length 4
  Bottom Layer w0.762: R19.2 119.634,78.651 U3.15
NetR20_2: R20.2 U3.9 | length 57.2
  Bottom Layer w0.762: U3.9 104.394,79.248 103.149,78.003 103.149,67.649 111.557,59.242 R20.2
NetR21_2: R21.2 U3.10 | length 58.7
  Bottom Layer w0.762: U3.10 106.934,80.061 104.292,77.419 104.292,68.123 114.91,57.506 R21.2
NetR22_2: R22.2 U3.11 | length 60.2
  Bottom Layer w0.762: U3.11 109.449,82.525 109.449,80.95 105.461,76.962 105.461,68.758 118.262,55.956 R22.2
NetR23_2: R23.2 U3.12 | length 5
  Bottom Layer w0.762: R23.2 109.601,78.613 109.855,78.867 109.855,78.93 111.932,81.007 111.932,82.468 U3.12
NetR24_2: R24.2 U3.13 | length 4.7
  Bottom Layer w0.762: R24.2 112.954,78.613 113.208,78.867 113.208,78.93 114.554,80.277 U3.13
NetR25_2: R25.2 U4.14 | length 4.2
  Bottom Layer w0.762: R25.2 156.032,78.634 156.032,79.629 156.845,80.442 U4.14
NetR26_2: R26.2 U4.15 | length 3.8
  Bottom Layer w0.762: U4.15 159.398,82.41 R26.2
NetR27_2: R27.2 U4.9 | length 57.2
  Bottom Layer w0.762: U4.9 144.145,79.807 142.621,78.283 142.621,67.437 150.918,59.14 R27.2
NetR28_2: R28.2 U4.10 | length 58.7
  Bottom Layer w0.762: U4.10 146.685,80.543 143.764,77.622 143.764,68.072 154.305,57.531 R28.2
NetR29_2: R29.2 U4.11 | length 60.2
  Bottom Layer w0.762: U4.11 149.128,82.326 149.128,80.914 144.907,76.693 144.907,68.707 157.692,55.922 R29.2
NetR30_2: R30.2 U4.12 | length 4.9
  Bottom Layer w0.762: R30.2 149.301,78.613 149.555,78.867 149.555,78.93 151.668,81.043 151.668,82.326 U4.12
NetR31_2: R31.2 U4.13 | length 4.5
  Bottom Layer w0.762: R31.2 152.688,78.613 152.942,78.867 152.942,78.93 154.305,80.294 U4.13
VCC7-20V: D7.A JDC1.1 | length 21.4
  Bottom Layer w0.762: JDC1.1@175.743,23.622 175.87,23.495 JDC1.1
  Bottom Layer w1.27: D7.A 172.39,37.44 170.409,35.458 170.409,26.264 173.05,23.622 JDC1.1@175.743,23.622
pads on no net: D3.8 D4.8 D5.8 D6.8 H1.1 H2.1 H3.1 H4.1 IC1.5 JDC1.3 U1.3 U1.5 U2.3 U2.5 U3.3 U3.5 U4.3 U4.5

## Polygon pours and split planes (outlines as drawn)
GND on Bottom Layer "GND_L02_P001" (solid, remove dead copper, pour order 1): 0,16.561 0,100.584 185.547,100.584 185.547,16.561

## Keep-outs
Keep-Out Layer:
  lines w0.254: 0,16.561 0,100.584 185.547,100.584 185.547,21.336 185.547,16.561 0,16.561

## Other copper
Bottom Layer:
  pour cut-out: 89.967,64.376 90.022,64.321 90.022,61.933 94.826,61.933 95.377,62.484 95.377,64.389
  pour cut-out: 93.218,73.152 94.188,73.152 94.685,72.656 94.685,69.991 93.762,69.068 93.488,69.342 92.837,69.342 92.837,70.104 92.583,70.358
  pour cut-out: 164.178,70.437 164.691,69.936 171.532,69.82 171.182,74.685 174.543,74.761 182.866,74.761 182.866,74.561 183.782,73.645 183.782,44.262 182.579,43.058 182.486,43.151 171.182,43.058 171.532,48.076 164.691,48.076 164.038,47.359 164.085,62.373
  pour cut-out: 84.061,84.261 84.072,84.25 87.24,84.25 89.701,81.788 92.075,81.788 92.329,82.042 92.202,82.169 92.202,86.749 92.723,87.27 92.583,87.41 92.583,88.9 86.868,88.9 86.868,85.217
  pour cut-out: 3.607,100.076 3.607,78.427 6.748,78.427 13.607,78.427 13.607,90.532 14.058,90.532 18.558,95.032 18.558,96.869 15.351,100.076
  pour cut-out: 149.839,30.353 158.771,30.353 158.771,26.035 149.839,26.035
  pour cut-out: 110.47,30.353 119.403,30.353 119.403,26.035 110.47,26.035
  pour cut-out: 63.988,30.353 72.921,30.353 72.921,26.035 63.988,26.035
  pour cut-out: 24.618,30.353 33.551,30.353 33.551,26.035 24.618,26.035
  pour cut-out: 142.621,85.598 160.655,85.598 162.814,83.439 162.814,81.652 160.466,79.304 160.466,75.311 160.453,75.299 155.971,75.299 155.958,75.311 142.494,75.311 142.621,75.438
  pour cut-out: 101.987,83.947 102.87,83.947 122.809,83.947 123.19,83.566 123.19,81.779 120.842,79.431 120.842,75.438 120.829,75.426 116.347,75.426 116.334,75.438 102.522,75.438
  pour cut-out: 56.92,85.344 75.184,85.344 77.089,83.439 77.089,81.652 74.741,79.304 74.741,75.311 74.728,75.299 70.246,75.299 70.233,75.311 56.769,75.311 56.896,75.438 56.896,85.27
  pour cut-out: 19.05,83.82 37.211,83.82 37.592,83.439 37.592,81.652 35.244,79.304 35.244,75.311 35.231,75.299 30.749,75.299 30.736,75.311 17.272,75.311 17.399,75.438 17.399,78.613

## Text inside footprints (layer, text, board x,y; h text height)
LOGO1: Bottom Layer "PIF" at 9.483,46.279 h1.43